# Altium PCB PumpTimerV2.PcbDoc
Units mm, origin at the board's own origin, x right, y up, seen from the top; angles counter-clockwise.
Board outline 50 x 50 mm, 2 copper layers (Top Layer, Bottom Layer); 13 components, 12 nets, 36 pads, 0 vias.
Unrouted connection lines stored in the file: 18.
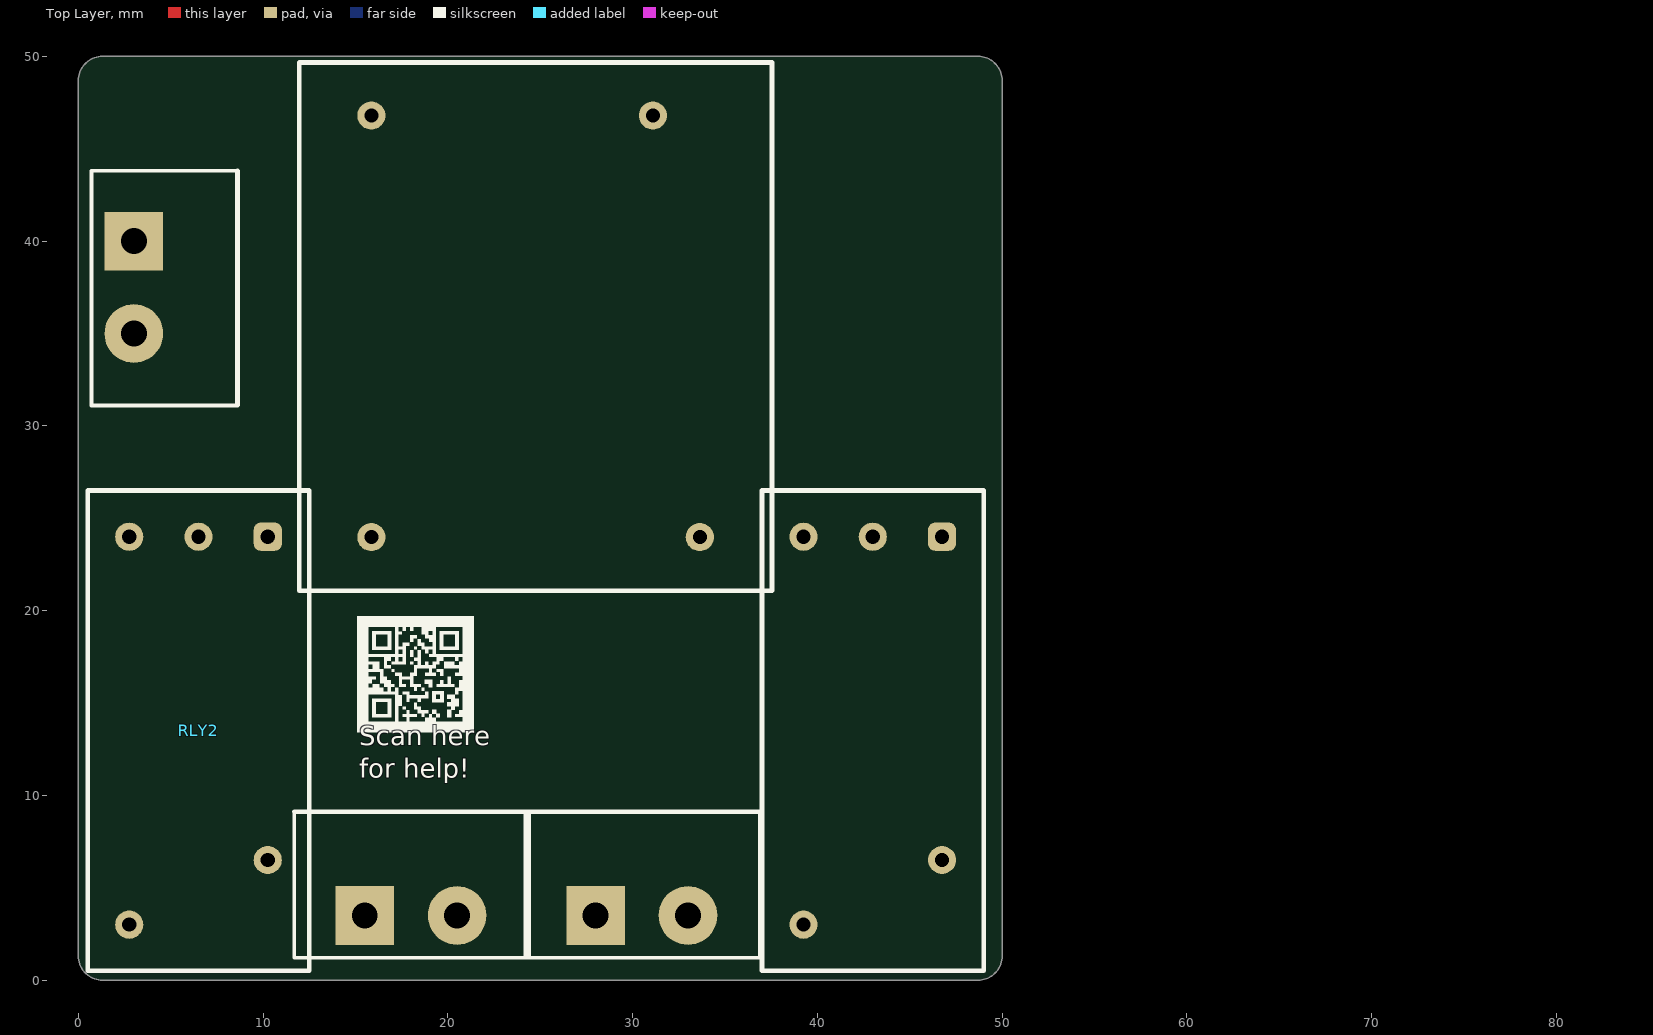
[diagram p0: Top Layer view]
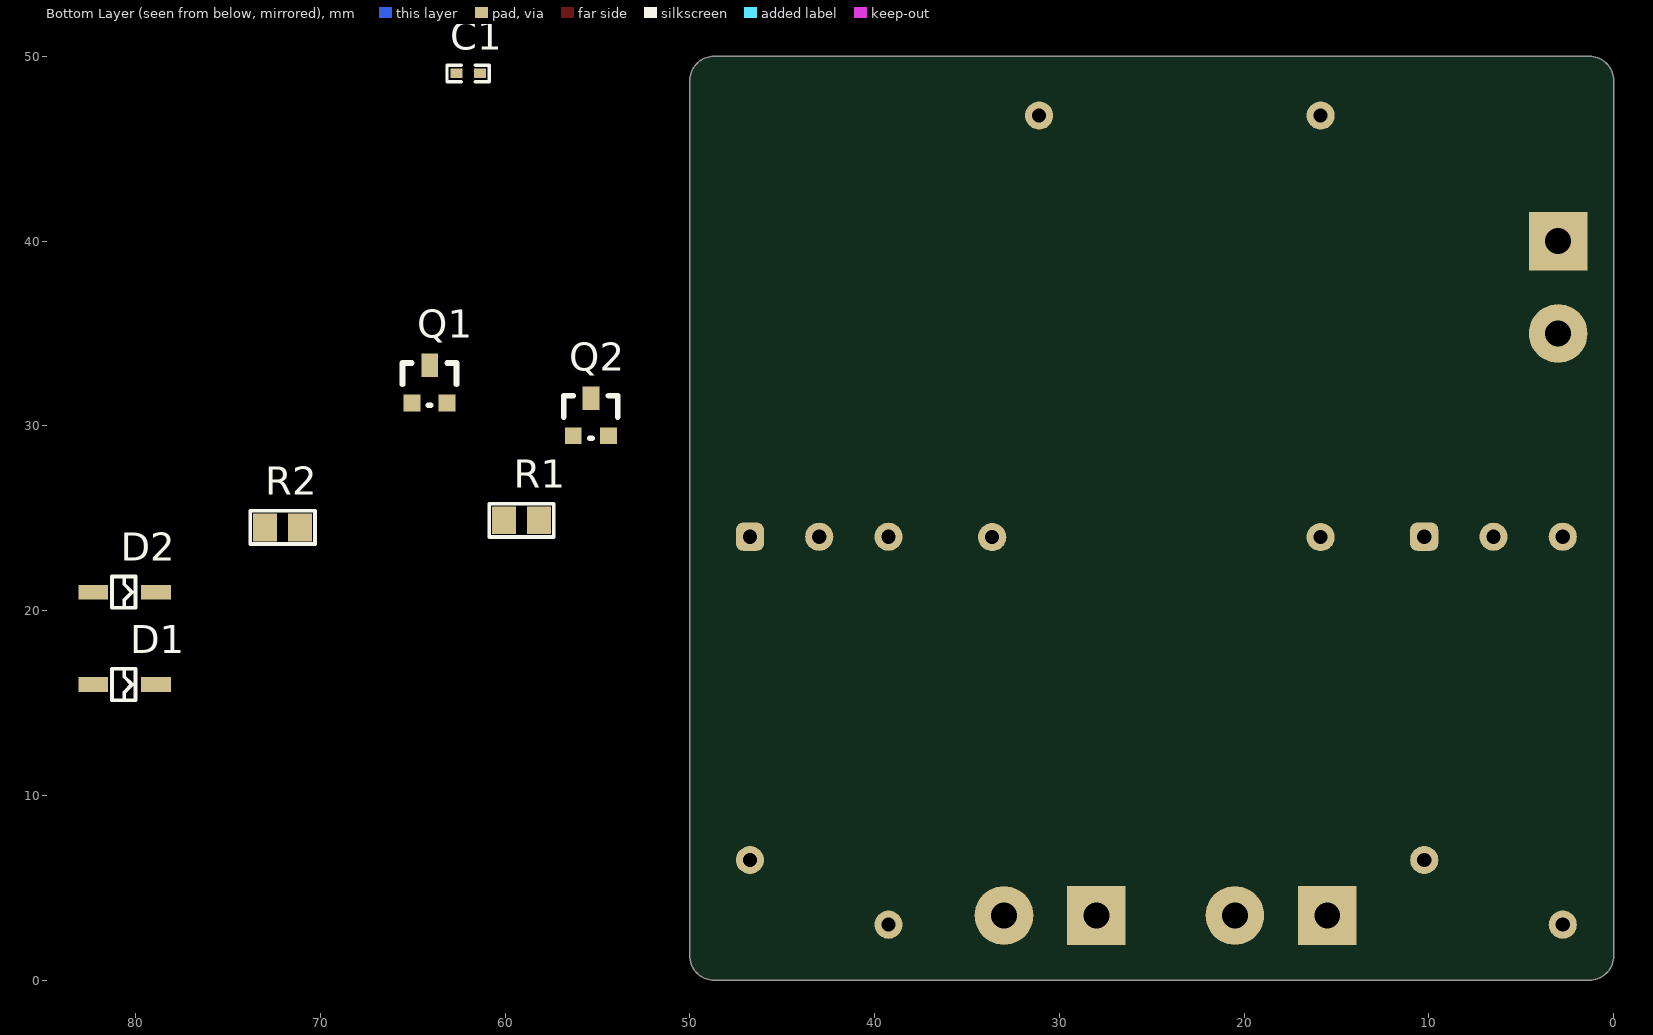
[diagram p1: Bottom Layer view, seen from below]

## Layer stack, top to bottom
Top Solder: solder mask 0.0102, Solder Resist, Dk 3.5
Top Layer: signal copper 0.0356
Dielectric 1: dielectric 0.32, FR-4, Dk 4.8
Bottom Layer: signal copper 0.0356
Bottom Solder: solder mask 0.0102, Solder Resist, Dk 3.5

## Board outline
1.3,0 cw(c1.3,1.3) 0,1.3 0,48.7 cw(c1.3,48.7) 1.3,50 48.7,50 cw(c48.7,48.7) 50,48.7 50,1.3 cw(c48.7,1.3) 48.7,0
cut-out: 131.5,60

## Design rules (kind name [scope] priority, off if disabled: settings)
Clearance [All] p1: gap=0.254 ignorepadtopadclearanceinfootprint=FALSE except(0: Arc-Hole Track-Hole SMDPad-Hole THPad-Hole Via-Hole Fill-Hole Poly-Hole Region-Hole Text-Hole)
PolygonConnect [All] p1: connectstyle=Relief reliefconductorwidth=1.016 reliefentries=4 polygonreliefangle="90 Angle" airgapwidth=0.254
RoutingVias [All] p1: holewidth=0.711 width=1.27 viastyle="Through Hole" minholewidth=0.711 minwidth=1.27 maxholewidth=0.711 maxwidth=1.27
SilkToSolderMaskClearance [IsPad] p1: minsilkscreentomaskgap=0.025 clearancetoexposedcopper=TRUE
SolderMaskExpansion [All] p1: expansion=0.102 istentingtop=FALSE
Width [All] p1: maxlimit=5.6 minlimit=0.254 preferedwidth=0.254 minimp=50.000000 maximp=50.000000 favimp=50.000000
29 further rules are at their usual default settings.

## Classes and differential pairs
component class PumpTimerV2: C1 Q1 Q2

## Components (designator, comment, footprint, x,y, rotation, side; value= is the part's Value field where it differs from the comment)
C1 "0.1µF" 0402_C 62.636,49.08 r180 bottom
CON1 "1935161" 5MM-CON-2 3,40 r0 top
CON2 "1935161" 5MM-CON-2 28,3.5 r90 top
CON3 "1935161" 5MM-CON-2 15.5,3.5 r90 top
D1 "100V" SOD123 82.3,16 r180 bottom
D2 "100V" SOD123 82.3,21 r180 bottom
PWR1 "IRM-05-5" RAC03-05SK 24.746,35.37 r90 top
Q1 "2SD1048-6-TB-E" SOT-23 65.049,31.242 r180 bottom
Q2 "2SD1048-6-TB-E" SOT-23 56.312,29.464 r180 bottom
R1 "402" 0805_R 60.066,24.892 r180 bottom
R2 "402" 0805_R 73,24.5 r180 bottom
RLY1 "ADW1209HLW" "ADW1 LOW-PROFILE RELAY" 43,13.5 r180 top
RLY2 "ADW1209HLW" "ADW1 LOW-PROFILE RELAY" 6.5,13.5 r180 top

## Footprints (in the part's own frame and the unit in brackets; to place one, negate y for a bottom-side part, rotate by r counter-clockwise, add the part's x,y. Pads: shape width x height; smd on the part's side, far side on the other; paste and mask are expansions set on the pad)
5MM-CON-2 [mm]
  rect 3.175x3.175 hole 1.4: 1(0,0)
  round 3.175 hole 1.4: 2(0,-5)
  silkscreen extent -2.29,-8.89 5.61,3.81, body extent -5.04,-7.94 3.96,2.46, height 11.5
0402_C [mil]
  rect 25x20 smd: 1(0,0) 2(50,0)
  silkscreen extent -20,-18 70,18, body extent -3,-10 53,10, height 20
0805_R [mm]
  rect 1.3x1.5 smd: 1(0,0) 2(1.9,0)
  silkscreen extent -0.8,-0.9 2.7,0.9, body extent -0.01,-0.64 1.99,0.62, height 0.43
"ADW1 LOW-PROFILE RELAY" [mil]
  rrect50% 60x60 hole 30: 1(-147.64,-413.39)
  round 60 hole 30: 2(0,-413.39) 3(147.64,-413.39) 4(-147.64,275.59) 5(147.64,413.39)
  silkscreen extent -236,-512 236,512, body extent -502,-494 224,494, height 622
RAC03-05SK [mil]
  round 60 hole 30: 1(-448.43,-350) 2(450,-250) 3(450,350) 4(-448.43,350)
  silkscreen extent -563,-504 563,504, body extent -561,-463 561,463, height 705
SOD123 [mm]
  rect 1.6x0.8 smd: 1(0,0) 2(3.4,0)
  silkscreen extent 1.02,-0.85 2.29,0.85, body extent -0.1,-0.81 3.6,0.79, height 1.27
SOT-23 [mil]
  rect 36x36 smd: 1(0,0) 2(75,0)
  rect 36x50 smd: 3(38,80)
  silkscreen extent -20,-5 95,85, body extent -21,-18 97,106, height 39

## Part data
C1: library part 5433, "CAP CER 0.1UF 10V 10% X7R 0402", Current Inventory=0, Manufacturer="TDK Corporation", Manufacturer Part Number=C1005X7R1A104K050BB, Supplier Part Number 1=445-4958-1-ND, ComponentLink1Description="Datasheet Document", Cost 1pc=0.1, Cost 100pc=0.0121, Cost 1000pc=0.0066, Internal PN=5433, Parameters=10V, Part Category=Capacitors, Part Verified=False, Primary Vendor Stock=617771, RoHS Compliant=True, SLInvtID=PDI-05433, Supplier 1=Digi-Key
CON1 CON2 CON3: library part 9497, "2 POSITION SCREW TERMINAL WIRE TO BOARD TERMINAL BLOCK HORIZONTAL WITH BOARD 0.197\" (5.00MM) THROUGH HOLE", Current Inventory=15956, Manufacturer="Phoenix Contact", Supplier Part Number 1=277-1667-ND, ComponentLink1Description="Datasheet Document", Cost 1pc=0.43, Cost 100pc=0.38, Cost 1000pc=0.3, Internal PN=9497, Manufacturer Part Number=1935161, Part Category=Connectors, Part Verified=False, Primary Vendor Stock=0, RoHS Compliant=False, SLInvtID=PDI-09497, Supplier 1=Digi-Key
D1 D2: library part 9142, "DIODE GEN PURP 100V 200MA SOD123", Current Inventory=0, Manufacturer="ON Semiconductor", Manufacturer Part Number=MMSD914T1G, Supplier Part Number 1=MMSD914T1GOSCT-ND, ComponentLink1Description="Datasheet Document", Cost 1pc=0.2, Cost 100pc=0.0998, Cost 1000pc=0.04186, Internal PN=9142, Parameters=200mA, Part Category=Diodes, Part Verified=False, Primary Vendor Stock=0, RoHS Compliant=True, SLInvtID=PDI-09142, Supplier 1=Digi-Key
PWR1: library part 9854, "AC/DC CONVERTER 5V 3W", Current Inventory=0, Manufacturer="Recom Power", Manufacturer Part Number=RAC03-05SK, Supplier Part Number 1=945-3441-ND, ComponentLink1Description="Datasheet Document", Cost 1pc=6.63, Cost 100pc=5.87, Cost 1000pc=5.3, Internal PN=9854, Part Category="Power Supplies", Part Verified=False, Primary Vendor Stock=0, RoHS Compliant=False, SLInvtID=PDI-09854, Supplier 1=Digi-Key
Q1 Q2: library part 9500, "BIPOLAR (BJT) TRANSISTOR NPN 15V 700MA 250MHZ 200MW SURFACE MOUNT 3-CP", Current Inventory=8401, Manufacturer="ON Semiconductor", Supplier Part Number 1=2SD1048-6-TB-EOSCT-ND, ComponentLink1Description="Datasheet Document", Cost 1pc=0.37, Cost 100pc=0.13, Cost 1000pc=0.09, Internal PN=9500, Manufacturer Part Number=2SD1048-6-TB-E, Part Category="Discrete Semiconductor Products", Part Verified=False, Primary Vendor Stock=0, RoHS Compliant=False, SLInvtID=PDI-09500, Supplier 1=Digi-Key
R1 R2: library part 365, "RES 402 OHM 1/10W .1% 0805 SMD", Current Inventory=0, Manufacturer=Susumu, Manufacturer Part Number=RR1220P-4020-B-M-T5, Supplier Part Number 1="(obsolete) RR12P402BCT-ND", ComponentLink1Description="Datasheet Document", Cost 1pc=0, Cost 100pc=0, Cost 1000pc=0, Internal PN=365, Parameters=±0.1%, Part Category=Resistors, Part Verified=False, Primary Vendor Stock=0, RoHS Compliant=True, SLInvtID=PDI-00365, Supplier 1=Digi-Key
RLY1 RLY2: library part 9495, "GENERAL PURPOSE TWO-COIL RELAY SPST-NO (1 FORM A) 9VDC COIL THROUGH HOLE", Current Inventory=131, Manufacturer="Panasonic - ECG", Supplier Part Number 1=255-5339-ND, ComponentLink1Description="Datasheet Document", Cost 1pc=5.83, Cost 100pc=4.37, Cost 1000pc=3.4, Internal PN=9495, Manufacturer Part Number=ADW1209HLW, Part Category=Relays, Part Verified=False, Primary Vendor Stock=0, RoHS Compliant=False, SLInvtID=PDI-09495, Supplier 1=Digi-Key

## Nets (pads, with @x,y where several pads share a name; then routed paths per layer and width w, separated by ;. In a path a pad name is that pad's centre, name@x,y a point inside that pad or via, vN(x,y) a via of type N, cw(c..) or ccw(c..) an arc to the next point about the centre after c; other vN are vias at no path point)
+5V: C1.2 PWR1.3
+9V: D1.2 D2.2 RLY1.2 RLY2.2
GND: C1.1 PWR1.2 R1.1 R2.1
NetQ1_B: R1.2
NetQ2_B: R2.2
Neutral: CON1.1 CON1.2 PWR1.4
Pump_In_1: CON2.1 PWR1.1 RLY1.4
Pump_In_2: CON3.1 RLY2.5
Pump_Out_1: CON2.2 RLY1.5
Pump_Out_2: CON3.2 RLY2.4
Reset: D1.1 RLY1.3 RLY2.3
Set: D2.1 RLY1.1 RLY2.1
pads on no net: Q1.1 Q1.2 Q1.3 Q2.1 Q2.2 Q2.3

## Polygon pours and split planes (outlines as drawn)
Pump_In_1 on Top Layer "Top Layer-Pump_In_1" (solid, pour order 8): 13.589,6.096

## Silkscreen, mask and mechanical layers (free items; w line width, h text height)
Top Overlay:
  drawing of 9 lines, arcs and shapes, not listed
  text "Scan here  / for help!" at 15.204,10.61 h1.75
Mechanical 1:
  the board outline again, w0.254